# Altium PCB XPIRL_0V0.PCBDOC (part 3 of 4)
Units mil, origin at the board's own origin, x right, y up, seen from the top; angles counter-clockwise.
Board outline 3497.26 x 1372.5 mil, 6 copper layers (Top Layer, Mid-Layer 1, Mid-Layer 2, Mid-Layer 3, Mid-Layer 4, Bottom Layer); 217 components, 126 nets, 782 pads, 361 vias.
Unrouted connection lines stored in the file: 96.
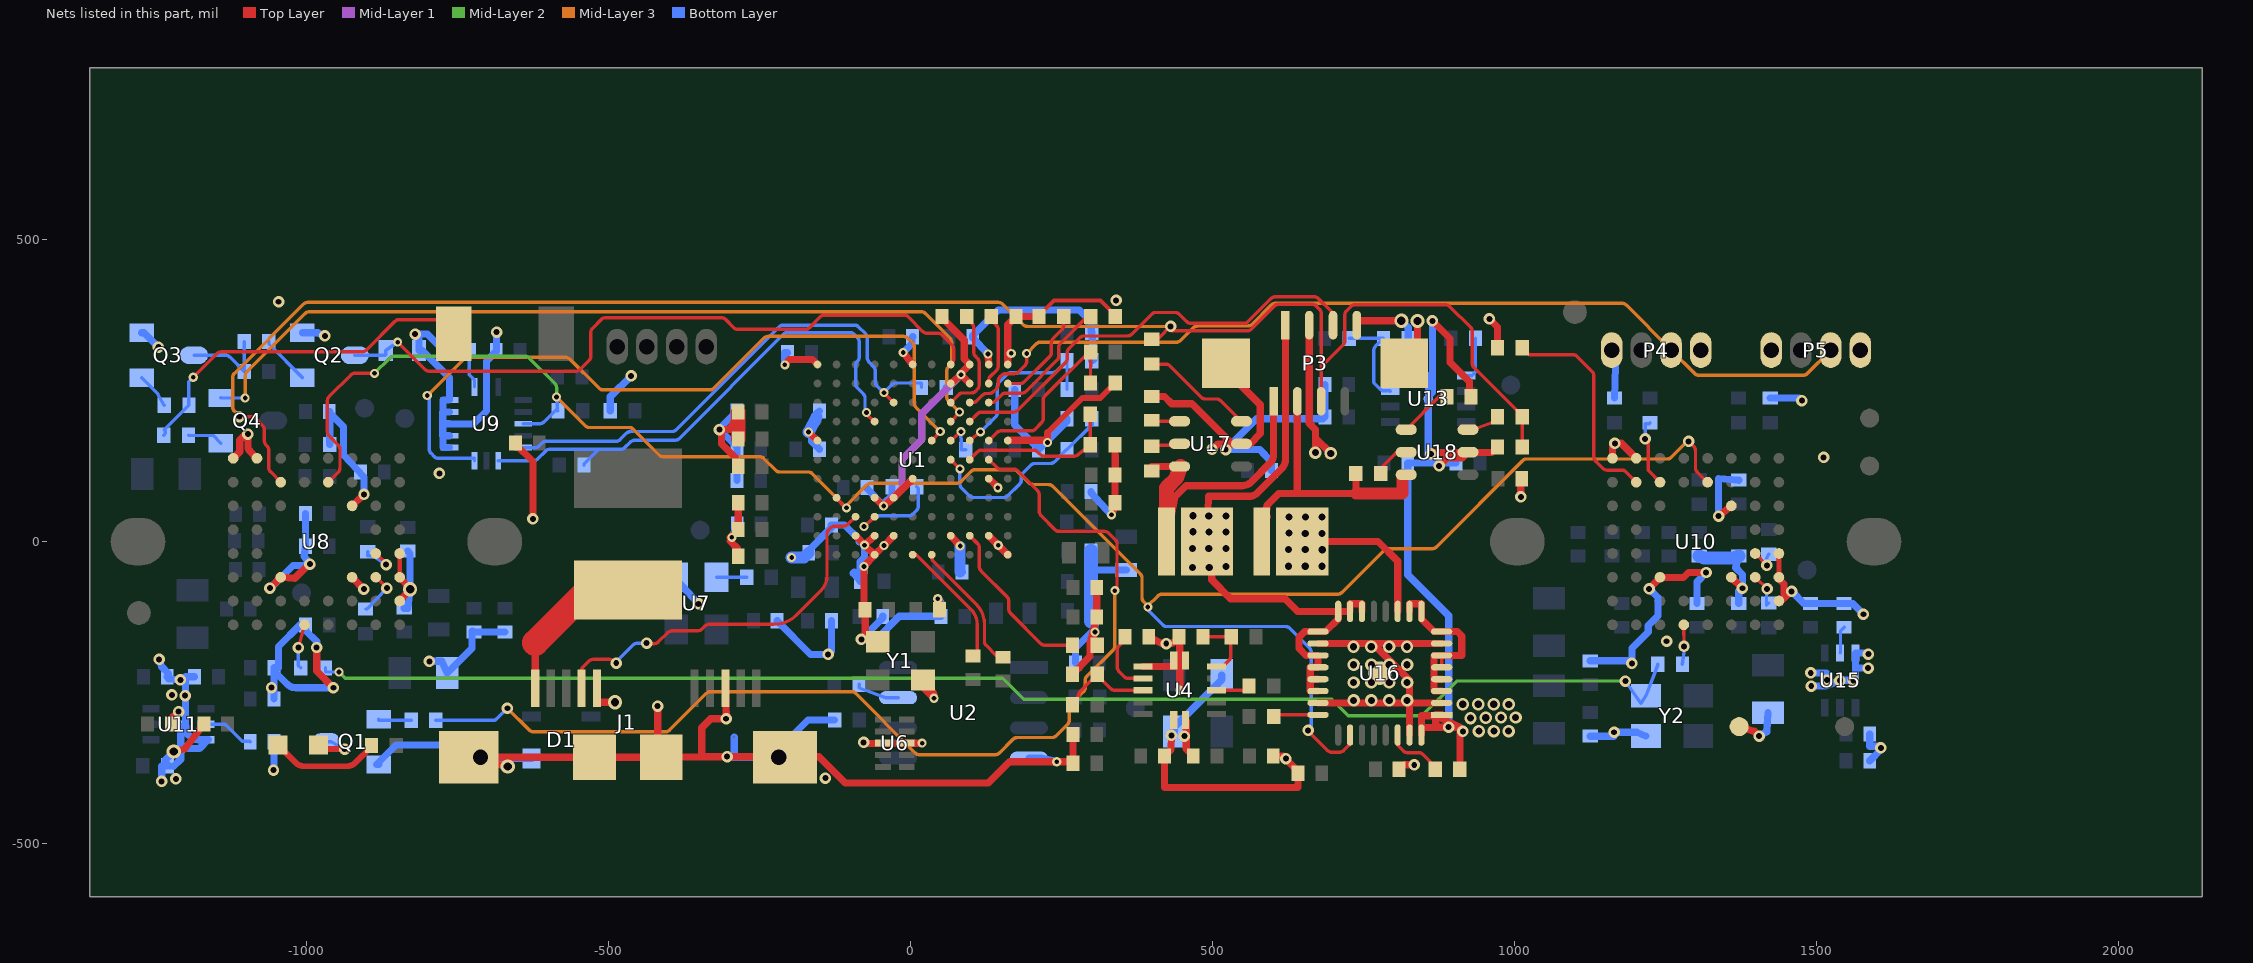
[diagram p7: the nets of this part, all layers, seen from the top]

## Via types
v1: diameter 19, hole 9.84, Top Layer to Bottom Layer, 139 vias
v2: diameter 15, hole 7.87, Top Layer to Bottom Layer, 113 vias
v3: diameter 20.47, hole 11.81, Top Layer to Bottom Layer, 58 vias
v4: diameter 23.62, hole 13.78, Top Layer to Bottom Layer, 42 vias
v5: diameter 0, hole 0, Top Layer to Bottom Layer, 9 vias

## Nets (pads, with @x,y where several pads share a name; then routed paths per layer and width w, separated by ;. In a path a pad name is that pad's centre, name@x,y a point inside that pad or via, vN(x,y) a via of type N, cw(c..) or ccw(c..) an arc to the next point about the centre after c; other vN are vias at no path point) (continued)
FX3_SDA: R25.2 U1.D10 U8.G4 U9.3 U10.G4 U16.26 | length 3903.4
  Top Layer w5.6: U8.G4@-964.57,98.43 -948.07,114.92 ccw(c-955,121.85) -945.2,121.85 -945.2,152.83 ccw(c-955,152.83) -948.07,159.76 -963.1,174.78 cw(c-956.17,181.71) -965.97,181.71 -965.97,233.31 cw(c-956.17,233.31) -963.1,240.24 -927.65,275.68 cw(c-920.72,268.75) -920.72,278.55 v2(-888.15,278.55) ; U1.D10@-123.11,72.7 -109.17,55.97 v2(-106.79,55.92) ; v1(657.4,-312.66) 656.93,-313.14 689.52,-345.73 ccw(c696.45,-338.8) 696.45,-348.6 709.68,-348.6 ccw(c709.68,-338.8) 716.61,-345.73 724.16,-338.18 ccw(c717.23,-331.25) 727.03,-331.25 U16.26@727.03,-320.3 ; v1(1287.57,165.94) 1295.99,157.53 ; 1295.99,157.53 cw(c1289.06,150.6) 1298.86,150.6 ; 1295.99,157.53 cw(c1289.06,150.6) 1298.86,150.6 ; 1295.99,157.53 cw(c1289.06,150.6) 1298.86,150.6 ; 1295.99,157.53 cw(c1289.06,150.6) 1298.86,150.6 ; 1298.86,121.92 ccw(c1308.66,121.92) 1301.73,114.99 ; 1298.86,121.92 ccw(c1308.66,121.92) 1301.73,114.99 ; 1298.86,121.92 ccw(c1308.66,121.92) 1301.73,114.99 ; 1298.86,121.92 ccw(c1308.66,121.92) 1301.73,114.99 ; 1298.86,121.92 1298.86,150.6 ; 1301.73,114.99 U10.G4@1316.56,100.15 ; U10.G4@1316.56,100.15 ccw(c1323.49,107.08) U10.G4@1318.9,98.43 ; U10.G4@1316.56,100.15 ccw(c1323.49,107.08) U10.G4@1318.9,98.43 ; U10.G4@1316.56,100.15 ccw(c1323.49,107.08) U10.G4@1318.9,98.43 ; U10.G4@1316.56,100.15 ccw(c1323.49,107.08) U10.G4@1318.9,98.43
  Mid-Layer 2 w5.6: v2(-888.15,278.55) -862.87,303.83 cw(c-855.94,296.9) -855.94,306.7 -638.45,306.7 cw(c-638.45,296.9) -631.52,303.83 -589.52,261.83 cw(c-596.45,254.9) -586.65,254.9 v2(-586.65,239.27)
  Mid-Layer 3 w5.6: v2(-586.65,239.27) -539.09,191.71 ; v2(392.15,-108.47) v2@392.15,-106.43 ; v1(1287.57,165.94) 1285.4,165.96 1259.08,139.64 ; -539.09,191.71 ccw(c-532.16,198.64) -532.16,188.84 ; -539.09,191.71 ccw(c-532.16,198.64) -532.16,188.84 ; -532.16,188.84 -466.35,188.84 ; -466.35,188.84 cw(c-466.35,179.04) -459.43,185.97 ; -466.35,188.84 cw(c-466.35,179.04) -459.43,185.97 ; -459.43,185.97 -416.69,143.23 ; -416.69,143.23 ccw(c-409.76,150.16) -409.76,140.36 ; -416.69,143.23 ccw(c-409.76,150.16) -409.76,140.36 ; -409.76,140.36 -250.35,140.36 ; -250.35,140.36 cw(c-250.35,130.56) -243.42,137.49 ; -250.35,140.36 cw(c-250.35,130.56) -243.42,137.49 ; -243.42,137.49 -224.09,118.17 ; -224.09,118.17 ccw(c-217.16,125.1) -217.16,115.3 ; -224.09,118.17 ccw(c-217.16,125.1) -217.16,115.3 ; -217.16,115.3 -170.23,115.3 ; -170.23,115.3 cw(c-170.23,105.5) -163.3,112.42 ; -170.23,115.3 cw(c-170.23,105.5) -163.3,112.42 ; -163.3,112.42 v2(-106.79,55.92) -108.7,57.83 -72.7,93.83 ; -72.7,93.83 cw(c-65.77,86.9) -65.77,96.7 ; -72.7,93.83 cw(c-65.77,86.9) -65.77,96.7 ; -72.7,93.83 cw(c-65.77,86.9) -65.77,96.7 ; -65.77,96.7 76.42,96.7 ; 76.42,96.7 ccw(c76.42,106.5) 83.35,99.57 ; 76.42,96.7 ccw(c76.42,106.5) 83.35,99.57 ; 76.42,96.7 ccw(c76.42,106.5) 83.35,99.57 ; 83.35,99.57 100.11,116.33 ; 100.11,116.33 cw(c107.04,109.4) 107.04,119.2 ; 100.11,116.33 cw(c107.04,109.4) 107.04,119.2 ; 100.11,116.33 cw(c107.04,109.4) 107.04,119.2 ; 107.04,119.2 169.49,119.2 ; 169.49,119.2 cw(c169.49,109.4) 176.42,116.33 ; 169.49,119.2 cw(c169.49,109.4) 176.42,116.33 ; 169.49,119.2 cw(c169.49,109.4) 176.42,116.33 ; 176.42,116.33 195.36,97.38 ; 195.36,97.38 ccw(c202.29,104.31) 202.29,94.51 ; 195.36,97.38 ccw(c202.29,104.31) 202.29,94.51 ; 195.36,97.38 ccw(c202.29,104.31) 202.29,94.51 ; 202.29,94.51 227.63,94.51 ; 227.63,94.51 cw(c227.63,84.71) 234.56,91.64 ; 227.63,94.51 cw(c227.63,84.71) 234.56,91.64 ; 227.63,94.51 cw(c227.63,84.71) 234.56,91.64 ; 234.56,91.64 379.75,-53.54 ; 379.75,-53.54 cw(c372.82,-60.47) 382.62,-60.47 ; 379.75,-53.54 cw(c372.82,-60.47) 382.62,-60.47 ; 379.75,-53.54 cw(c372.82,-60.47) 382.62,-60.47 ; 382.62,-92.84 ccw(c392.42,-92.84) 385.49,-99.77 ; 382.62,-92.84 ccw(c392.42,-92.84) 385.49,-99.77 ; 382.62,-92.84 ccw(c392.42,-92.84) 385.49,-99.77 ; 382.62,-92.84 382.62,-60.47 ; 385.49,-99.77 v2@392.15,-106.43 ; v2@392.15,-106.43 408.4,-90.18 ; 408.4,-90.18 cw(c415.33,-97.11) 415.33,-87.31 ; 408.4,-90.18 cw(c415.33,-97.11) 415.33,-87.31 ; 408.4,-90.18 cw(c415.33,-97.11) 415.33,-87.31 ; 408.4,-90.18 cw(c415.33,-97.11) 415.33,-87.31 ; 415.33,-87.31 706.23,-87.31 ; 706.23,-87.31 ccw(c706.23,-77.51) 713.16,-84.44 ; 706.23,-87.31 ccw(c706.23,-77.51) 713.16,-84.44 ; 706.23,-87.31 ccw(c706.23,-77.51) 713.16,-84.44 ; 706.23,-87.31 ccw(c706.23,-77.51) 713.16,-84.44 ; 713.16,-84.44 782.76,-14.84 ; 782.76,-14.84 cw(c789.69,-21.77) 789.69,-11.97 ; 782.76,-14.84 cw(c789.69,-21.77) 789.69,-11.97 ; 782.76,-14.84 cw(c789.69,-21.77) 789.69,-11.97 ; 782.76,-14.84 cw(c789.69,-21.77) 789.69,-11.97 ; 789.69,-11.97 862.53,-11.97 ; 862.53,-11.97 ccw(c862.53,-2.17) 869.46,-9.1 ; 862.53,-11.97 ccw(c862.53,-2.17) 869.46,-9.1 ; 862.53,-11.97 ccw(c862.53,-2.17) 869.46,-9.1 ; 862.53,-11.97 ccw(c862.53,-2.17) 869.46,-9.1 ; 869.46,-9.1 1012.46,133.9 ; 1012.46,133.9 cw(c1019.39,126.97) 1019.39,136.77 ; 1012.46,133.9 cw(c1019.39,126.97) 1019.39,136.77 ; 1012.46,133.9 cw(c1019.39,126.97) 1019.39,136.77 ; 1012.46,133.9 cw(c1019.39,126.97) 1019.39,136.77 ; 1019.39,136.77 1252.15,136.77 ; 1252.15,136.77 ccw(c1252.15,146.57) 1259.08,139.64 ; 1252.15,136.77 ccw(c1252.15,146.57) 1259.08,139.64 ; 1252.15,136.77 ccw(c1252.15,146.57) 1259.08,139.64 ; 1252.15,136.77 ccw(c1252.15,146.57) 1259.08,139.64
  Bottom Layer w5.6: U9.3@-641.76,194.99 -614.81,194.99 ccw(c-614.81,204.79) -607.88,197.86 -588.25,217.48 R25.2@-584.2,216.62 -585.28,216.62 -585.28,239.27 v2(-586.65,239.27) ; v2(392.15,-108.47) 392.15,-109.23 ccw(c401.95,-109.23) 395.02,-116.16 416.64,-137.78 ccw(c423.57,-130.85) 423.57,-140.65 620.4,-140.65 cw(c620.4,-150.45) 627.33,-143.52 659.81,-176 cw(c652.88,-182.93) 662.68,-182.93 662.68,-302.34 cw(c652.88,-302.34) 659.81,-309.27 656.91,-312.17 v1(657.4,-312.66)
G_FSYNC: U1.G5 U9.8 | length 1252.3
  Top Layer w5.6: U1.G5@34.37,167.19 v2(48.53,182.06)
  Mid-Layer 3 w5.6: v2(-800.69,241.64) -740.19,302.15 cw(c-733.26,295.22) -733.26,305.02 -571.34,305.02 cw(c-571.34,295.22) -564.41,302.15 -516.26,254 ccw(c-509.33,260.93) -509.33,251.13 -333.16,251.13 ccw(c-333.16,260.93) -326.23,254 -243.43,336.8 cw(c-236.5,329.87) -236.5,339.67 -11.95,339.67 cw(c-11.95,329.87) -5.02,336.8 2.91,328.86 cw(c-4.02,321.93) 5.78,321.93 5.78,228.87 ccw(c15.58,228.87) 8.65,221.94 v2(48.53,182.06)
  Bottom Layer w5.6: v2(-800.69,241.64) -800.21,241.16 cw(c-807.14,234.24) -797.34,234.24 -797.34,152.85 ccw(c-787.54,152.85) -794.47,145.92 -789.35,140.8 ccw(c-782.42,147.73) -782.42,137.93 -722.87,137.93 -722.47,137.53 U9.8@-722.47,133.96
GND: C1.1 C2.2 C3.1 C4.1 C5.1 C6.1 C7.1 C8.1 C9.1 C10.1 C11.1 C12.1 C13.1 C14.1 C15.1 C16.1 C17.1 C18.2 C19.1 C20.2 C21.1 C22.1 C23.1 C24.1 C25.1 C26.1 C27.1 C28.1 C29.1 C30.2 C31.1 C32.2 C33.1 C34.1 C35.1 C36.2 C37.1 C38.1 C39.1 C40.2 C43.1 C44.1 C45.1 C46.1 C47.1 C48.1 C49.1 C50.2 C51.1 C52.1 C55.2 C56.2 C57.1 C58.1 C59.1 C60.1 C61.1 C65.1 C66.1 C76.2 C77.1 C78.1 C79.1 C81.1 C82.1 C86.1 C94.1 C95.1 C97.1 C98.1 C130.1 C132.1 C134.1 C135.1 C136.1 C137.1 C139.1 C144.1 C145.1 C146.1 C148.1 C152.1 C176.2 C177.1 C178.1 C179.1 C181.1 C182.1 D1.1 GND.1 J1.5 J1.8 J1.11 J1.12 J1.14 J1.15 J1.16 J1.17 P3.8 P3.9 P3.10 P4.1 P4.4 P5.1 P5.4 Q1.2 Q2.2 Q3.2 R4.1 R12.2 R16.2 R17.2 R18.2 R19.2 R20.2 R21.2 R28.2 R29.2 R30.2 R31.2 R32.2 R39.2 R42.2 R53.2 R61.1 R69.1 R75.1 R76.1 R83.2 R93.2 R96.1 R98.1 S2.2 U1.A1 U1.A8 U1.B2 U1.B4 U1.B7 U1.B8 U1.B9 U1.D7 U1.D8 U1.E2 U1.E6 U1.G1 U1.G11 U1.K3 U1.K4 U1.L1 U1.L2 U1.L3 U1.L6 U1.L11 U2.4 U4.6 U4.11 U4.12 U4.13 U4.14 U4.15 U6.3 U6.8 U7.2 U8.B1 U8.C1 U8.C3 U8.C6 U8.D1 U8.F3 U8.H7 U8.H8 U9.9 U9.10 U9.11 U9.12 U9.13 U9.15 U10.B1 U10.C1 U10.C3 U10.C6 U10.D1 U10.F3 U10.H7 U10.H8 U11.3 U11.7 U13.8 U13.9 U15.3 U15.7 U16.1 U16.2 U16.7 U16.18 U16.23 U16.31 U16.32 U16.33 U17.2 U18.2 Y1.2 Y1.4 Y2.2 | length 15375.3
  Top Layer w6.3: R17.2@211.95,372.74 211.95,374.31 236.7,399.06 313.77,399.06 338.52,374.31 R19.2@338.52,372.74
  Top Layer w7.87: U8.C1@-846.46,-59.06 U8.D1@-846.46,-19.69 ; U10.C1@1437.01,-59.06 U10.D1@1437.01,-19.69
  Top Layer w9.84: 226.01,179.98 283.75,237.73 313.42,237.73 R31.2@338.26,262.58
  Top Layer w12: C79.1@-1224.34,-302.13 -1224.34,-293.48 v1(-1212.51,-281.65) ; v4(-1220.5,-347.47) -1202.16,-343.03 C39.1@-1170.56,-302.13 ; U8.H8@-1122.05,137.8 -1111.01,148.83 -1111.01,167.69 -1101.07,177.75 v1(-1097.68,177.75) -1097.68,154.11 -1094.33,150.2 U8.H7@-1082.68,137.8 ; v1(-1061.22,-77.07) U8.C6@-1043.31,-59.06 -1019.96,-60.84 -998.75,-39.63 -992.14,-39.63 v1(-995.17,-37.33) ; v1(-983.85,-175.35) -983.85,-214.35 v1(-956.17,-242.02) ; U8.C3@-925.2,-59.06 v1(-905.71,-78.74) ; U8.F3@-925.2,59.06 v1(-905.46,78.3) ; U8.B1@-846.46,-98.43 v4(-829.13,-78.88) U8.C1@-846.46,-59.06 ; v4(-667.65,-372.4) -754.28,-354.43 J1.17@-732.28,-357.12 J1.15@-413.39,-357.12 ; C43.1@-654.57,163.28 -654.57,161.31 -625.75,132.5 v1(-625.75,37.46) ; J1.5@-519.69,-242.95 -519.69,-265.95 v4(-489.94,-265.95) ; v1(-419.23,-272.43) -419.23,-354.37 J1.15@-413.39,-357.12 ; v1(-316.97,185.54) v1@-313.5,185.54 ; J1.8@-307.09,-242.95 -306.2,-242.95 -306.2,-268.05 v1(-305.86,-293.3) -331.51,-293.3 -346.46,-308.24 -346.46,-356.3 ; C33.1@-285.88,-24.44 -287.53,-11 -299.41,0.87 v2(-296.5,7.06) -299.41,6.49 C40.2@-285.88,20.02 C7.1@-285.88,64.27 ; C4.1@-285.88,124.55 -290.78,139.28 -313.5,162 v1@-313.5,185.54 ; C13.1@-285.88,214.63 -299.79,185.54 v1@-313.5,185.54 ; J1.16@-208.66,-357.12 -243.49,-356.3 -346.46,-356.3 ; v2(-208.7,292.63) -201.48,301.61 -163.04,301.61 U1.L11@-154.6,293.17 ; v2(-169.49,181.51) U1.G11@-154.6,167.19 ; U1.B9@-91.61,9.71 v2(-76.84,-5.88) ; v1(-82.01,-162.07) -61.09,-160.92 -61.89,-162.72 -58.93,-165.68 Y1.2@-54.79,-166.07 -75.45,-156.57 -75.45,-114.81 -75.57,-114.7 C50.2@-76.01,-112.8 -77.77,-111.04 v2(-77.77,-41.24) U1.A8@-60.11,-21.79 ; v1(-78.22,-332.6) -78.1,-334.41 U6.3@-46.35,-333.74 U6.8@-6.98,-333.74 v2(18.57,-333.74) ; U1.B8@-60.11,9.71 v2(-76.84,-5.88) ; U1.D8@-60.11,72.7 v2(-45.14,59.06) -33.08,68.63 U1.D7@-28.62,72.7 U1.E6@2.88,104.19 ; U1.B7@-28.62,9.71 v2(-44.37,-6.56) U1.A8@-60.11,-21.79 ; v2(-12.79,313.22) U1.L6@2.88,293.17 ; v2(44.42,-94.63) 44.42,-96.15 47.36,-99.09 C49.1@47.36,-112.8 ; R16.2@51.44,372.74 46.84,375 88.37,333.48 88.37,302.17 U1.L3@97.37,293.17 82.78,278.58 v2(82.78,276.27) ; U1.B4@65.87,9.71 v2(81.55,-7.26) ; U1.K4@65.87,261.67 v2(82.78,276.27) ; U1.K3@97.37,261.67 v2(82.78,276.27) ; v2(127.41,310.7) U1.L2@128.86,293.17 ; U1.B2@128.86,9.71 v2(144.61,-6.04) U1.A1@160.36,-21.79 ; U1.E2@128.86,104.19 130.71,102.73 130.82,102.73 143.81,89.73 v2(143.81,89.15) ; U1.G1@160.36,167.19 161.12,167.95 222.08,167.95 v2(226.01,164.03) 226.01,179.98 ; U1.L1@160.36,293.17 160.36,304.43 ; v2(166.05,311.75) 160.36,304.43 ; R17.2@211.95,372.74 R12.2@174.09,372.74 160.36,359 160.36,304.43 ; R18.2@267.54,-219.67 296.56,-189.96 296.56,-166.03 R21.2@297.5,-165.09 ; C25.1@268.33,-319.48 C59.1@268.33,-367.12 265.73,-364.52 v2(241.41,-364.52) 163.35,-364.52 128.22,-399.65 -108.89,-399.65 -152.24,-356.3 -346.46,-356.3 ; C21.1@307.7,-76.2 C20.2@307.7,-124.95 R21.2@297.5,-165.09 ; R21.2@308.49,-171.75 299.1,-167.64 v2(304.72,-149.58) R21.2@297.5,-165.09 ; v2(331.88,44.26) 341.43,63.17 C55.2@337.99,64.2 337.68,129.46 338.47,130.24 ; C60.1@337.98,110.35 338.47,127.64 338.47,130.24 ; R28.2@338.01,160.43 338.47,130.24 ; U4.6@383.86,-206.87 444.88,-206.87 C47.1@444.88,-156.08 ; C38.1@393.69,-157.68 417.82,-169.73 418.74,-168.81 v1(422.72,-168.81) 432.16,-168.81 C47.1@443.93,-157.68 C47.1@444.88,-156.08 ; C135.1@398.79,240.28 419.92,240.28 431.82,228.38 465.21,228.38 531.88,161.71 U17.2@544.01,161.71 ; v1(431.33,-320.76) 430.47,-344.46 C17.1@419.92,-355.01 419.92,-406.99 640.9,-406.99 640.9,-380.98 C130.1@640.36,-380.44 ; U4.11@444.88,-246.24 C47.1@444.88,-156.08 ; U4.12@454.72,-295.46 455.87,-296.61 455.87,-343.53 C36.2@467.36,-355.01 ; v1(498.43,152.61) 508.64,161.71 U17.2@544.01,161.71 ; P3.9@521.65,295.28 522.22,294.71 522.22,282.89 578.51,226.6 578.51,179 561.7,161.73 U17.2@547.24,161.73 554.12,161.71 U17.2@544.01,161.71 ; C37.1@599.81,-355.01 616.5,-355.01 v1(620.84,-359.34) C130.1@640.36,-380.44 ; C130.1@640.77,-383.38 640.77,-380.89 C130.1@640.36,-380.44 ; U16.23@673.88,-267.15 U16.2@878.61,-267.15 v3@825.46,-267.15 ; U16.18@673.88,-168.72 712.19,-168.72 ; P3.8@738.19,358.27 738.19,364.46 739.28,365.55 v4(811.99,365.55) ; C137.1@808.31,-376.88 817.19,-369.52 v1(833.31,-369.52) ; P3.10@816.93,295.28 817.32,295.67 838.56,295.67 v4(838.56,365.18) ; U16.31@825.46,-320.3 v3@825.46,-267.15 ; v1(860.83,145.14) 863.3,147.61 U18.2@929.36,147.61 ; v1(863.44,365.26) 892.43,336.26 892.43,297.1 924.91,264.63 924.91,244.79 C134.1@927.13,239.71 ; 865.05,-307.37 845.14,-307.7 U16.32@845.14,-320.3 845.14,-288.42 878.61,-288.42 879.9,-293.42 v1@908.86,-307.2 ; v1(874.48,125.19) 888.1,138.81 913.12,138.81 U18.2@922.32,148.01 922.71,147.61 U18.2@929.36,147.61 ; U16.1@878.61,-286.83 868.84,-286.83 868.84,-307.2 v1(890.34,-307.2) v1@908.86,-307.2 ; U16.7@878.61,-168.72 712.19,-168.72 ; R93.2@908.86,-377.05 v1@908.86,-307.2 ; v1(957.71,368.75) 971.13,355.22 R30.2@971.13,320.99 ; R96.1@971.13,156.58 962.17,147.61 U18.2@929.36,147.61 ; v1(1009.75,74.17) 1009.75,102.64 C136.1@1011.29,104.18 ; U10.H8@1161.42,137.8 1161.42,158.61 v1(1165.45,162.64) 1175.94,162.64 U10.H7@1200.79,137.8 ; v1(1222.21,-78.2) U10.C6@1240.16,-59.06 1278.99,-59.61 1287.37,-51.23 v1(1316.55,-51.17) ; v1(1337.1,42.08) U10.F3@1358.27,59.06 ; U10.C3@1358.27,-59.06 v1(1376.66,-77.26) ; GND.1@1371.16,-306.32 1396.2,-314.1 v1(1404.1,-322) ; U10.B1@1437.01,-98.43 1445.36,-93.92 ; U10.C1@1437.01,-59.06 1435.7,-60.68 1445.36,-70.35 1445.36,-93.92 ; v1(1458.04,-82.29) 1445.36,-93.92 ; J1.15@-413.39,-357.12 -346.46,-356.3 ; v2(-76.84,-5.88) U1.A8@-60.11,-21.79 ; 712.19,-168.72 764.62,-168.72 825.46,-229.56 v3@825.46,-267.15 ; Y1.4@13.87,-234.98 25.19,-234.98 Y1.4@20.01,-229.07 38.2,-252.15 v2(38.2,-259.31) Y1.4@13.87,-234.98
  Top Layer w23.62: C12.1@-285.88,169.63 C13.1@-285.88,214.63
  Mid-Layer 1 w12: v2(-45.14,59.06) -14.82,87.96 -14.82,136.1 17.95,168.87 17.95,211.44 v2(82.78,276.27)
  Bottom Layer w12: Q3.2@-1273.54,345.94 -1269.85,345.94 v1(-1245.72,321.81) ; v1(-1244.6,-194.9) -1240.28,-207.21 -1229.25,-218.24 C78.1@-1229.25,-226.92 ; v1(-1240.4,-396.91) -1240.4,-371.97 R42.2@-1230.84,-371.21 ; C78.1@-1231.28,-223.77 -1229.25,-225.79 C78.1@-1229.25,-226.92 ; U11.7@-1212.6,-302.19 -1208.66,-310.07 -1208.66,-347.04 -1208.78,-347.16 -1208.78,-360.25 -1220.82,-372.28 R42.2@-1230.84,-371.21 ; v1(-1209.32,-228.92) C78.1@-1229.25,-226.92 ; C86.1@-1185.97,-223.77 -1200.89,-223.77 -1200.89,-292 -1200.65,-315.72 -1188.59,-327.78 U11.3@-1167.32,-327.78 -1163.39,-327.78 -1178.35,-342.75 -1202.16,-342.75 v4(-1220.5,-347.47) -1234.89,-361.87 R42.2@-1230.84,-371.21 ; v1(-1061.22,-77.07) -1060.61,-77.07 -1023.01,-39.47 -991.98,-39.47 v1(-995.17,-37.33) -1004.27,-24.86 C44.1@-1002.33,-7.59 C61.1@-1002.33,46.33 ; v1(-1055.27,-378.41) -1054.46,-377.59 C81.1@-1054.4,-331.23 ; C46.1@-1054.49,-260.61 C77.1@-1054.49,-214.13 ; Q2.2@-1007.27,345.94 -981.74,345.94 -980.9,345.1 v1(-970.28,340.59) ; v1(-983.85,-175.35) -983.85,-165.52 -1002.33,-147.04 C52.1@-1002.33,-137.92 -1002.51,-137.74 -1010.99,-137.74 -1047.12,-173.87 -1047.12,-209.05 C77.1@-1054.49,-209.05 C77.1@-1054.49,-214.13 ; R98.1@-962.18,160.6 -962.18,214.76 C22.1@-962.96,215.55 -962.96,213.58 -939.4,190.02 -939.4,143.28 -905.46,106.86 v1(-905.46,78.3) ; v1(-956.17,-242.02) -1017.9,-242.02 ; Q1.2@-881.17,-369.05 -884.7,-369.05 -852.41,-336.75 -724.31,-336.75 J1.11@-712.6,-357.12 -682.93,-357.12 v4(-667.65,-372.4) -665.92,-370.67 -665.92,-359.16 D1.1@-627.93,-359.16 ; C48.1@-838.86,-110.28 -832.8,-110.28 v4(-829.13,-78.88) -829.13,-19.7 C82.1@-833,-15.82 ; v1(-820.91,343.58) v1@-814.22,343.58 ; v1(-797.29,-198.19) -776.91,-198.19 C45.1@-767.63,-217.72 -726.64,-176.74 -726.64,-147.93 -725.24,-147.93 C51.1@-723.52,-149.65 C28.1@-672.01,-149.65 ; C57.1@-770.31,316.43 -776,318.33 -776,318.83 -800.75,343.58 v1@-814.22,343.58 ; U9.9@-763.81,155.62 -774.69,155.62 -774.69,175.3 U9.10@-763.81,175.3 -774.92,175.3 U9.11@-774.92,194.99 ; v1(-686.01,346.72) -686.01,316.84 C58.1@-686.42,316.43 -686.42,314.92 -702.78,298.56 U9.15@-702.78,256.01 -702.78,216.3 -724.5,194.58 -753.49,194.58 U9.11@-763.81,194.99 U9.11@-774.92,194.99 ; R76.1@-497.6,216.62 -497.6,239.85 v1(-463.13,274.32) ; U7.2@-388.61,-59.06 -388.61,-62.98 v1(-351.59,-103.3) ; v2(-296.5,7.06) -287.62,27.14 C24.1@-287.62,29.01 ; v5(-292.6,-323.46) -292.6,-357.12 J1.12@-218.5,-357.12 -218.5,-343.34 -170.42,-295.26 R4.1@-126.34,-295.26 ; C66.1@-288.09,100.99 C95.1@-288.09,152.73 -288.09,156.67 v1(-316.97,185.54) -316.97,187.34 C97.1@-288.09,216.22 ; C1.1@-221.47,-131.06 -221.47,-131.57 -166.17,-186.86 v1(-137.03,-186.86) -131.6,-181.43 C8.1@-131.6,-131.06 ; v2(-208.7,292.63) -208.7,312.61 C23.1@-204.19,312.61 ; v2(-169.49,181.51) -164.37,176.39 -164.37,165.7 C9.1@-151.23,152.73 ; C6.1@-169.25,-18.4 -169.25,-14.61 -131.76,22.88 C16.1@-131.76,27.51 -109.8,27.51 -85.64,3.35 -85.64,-0.85 -81.87,-0.85 v2(-76.84,-5.88) -76.84,-25.93 -83.72,-32.81 C19.1@-83.72,-65.49 -95.6,-52.31 -94.16,-50.88 -93.77,-50.88 -93.77,-52.31 -77.77,-52.31 v2(-77.77,-41.24) ; C26.1@-156.07,206.35 -156.07,212.95 C26.1@-151.23,216.22 ; C10.1@-72.76,89.35 -72.76,87.82 v2(-45.14,59.06) -43.96,58.82 -43.96,63.53 -31.16,76.32 R20.2@-31.16,90.67 ; C18.2@-46.51,-123.8 -46.51,-126.57 v1(-82.01,-162.07) -57.52,-162.07 -19.25,-123.8 C30.2@49.75,-123.8 49.75,-99.97 v2(44.42,-94.63) ; v2(-12.79,313.22) 0.9,326.91 C5.1@2.84,339.13 ; R75.1@58.51,255.1 61.6,255.1 v2(82.78,276.27) ; v2@81.33,-7.47 v2(81.55,-7.26) ; v2(127.41,310.7) 102.31,337.6 C94.1@102.31,339.24 102.31,341.21 144.46,383.36 278.83,383.36 298.61,363.58 298.61,347.26 R39.2@299.27,346.6 302.87,301.26 R29.2@299.27,299.33 ; C3.1@171.87,251.8 171.87,193.17 C14.1@205.44,159.6 ; U2.4@195.41,-358.46 216.08,-358.46 v2(241.41,-364.52) ; v2(226.01,164.03) 212.13,164.42 C14.1@205.44,159.6 ; R32.2@258.32,203.25 258.32,199.09 C14.1@211.24,152 C14.1@205.44,159.6 ; C15.1@272.51,-200.8 272.51,-176.2 299.12,-149.58 v2(304.72,-149.58) 304.72,-137.79 298.75,-131.81 ; C35.1@298.12,83.11 298.12,81.63 v2(331.88,44.26) ; C11.1@298.48,-114.34 298.48,-66.25 C56.2@298.12,-65.89 C27.1@298.12,-15.42 298.12,-47.15 S2.2@356.5,-47.15 ; C65.1@435.96,-314.68 435.96,-307.26 514.7,-228.52 C34.1@514.7,-221.09 ; C132.1@596.71,117.75 596.71,132.3 577.5,152.29 v1(521.09,152.29) 571.96,203.16 682.39,203.16 C98.1@685.38,206.16 C2.2@685.38,260.27 ; U13.8@793.47,274.73 857.16,274.73 ; v4(811.99,365.55) 823.25,354.29 R53.2@823.25,336.32 823.25,274.73 857.16,274.73 ; v1(863.44,365.26) 863.44,247.12 U13.9@857.16,240.85 ; v1(890.34,-307.2) 890.34,-122.75 822.46,-54.87 C32.2@822.46,129.94 856.46,129.94 ; C29.1@902.59,129.94 856.46,129.94 ; C182.1@1124.77,-322.09 1163.41,-322.09 1164.12,-321.37 v1(1164.12,-315.69) 1202.19,-315.69 Y2.2@1216.79,-322.04 ; C144.1@1124.77,-197.46 1189.41,-197.43 v1(1193.7,-201.71) 1193.7,-176.61 1220.71,-149.59 1220.71,-138.96 1236.72,-122.95 1236.72,-92.71 v1(1222.21,-78.2) ; P4.4@1160.12,317.13 1167.44,317.13 R69.1@1164.93,237.81 ; C148.1@1301.53,-102.44 1301.53,-66.55 v1(1316.55,-51.17) ; v1(1337.1,42.08) 1336.97,104.23 C176.2@1370.55,101.73 ; C145.1@1370.55,-102.44 1370.55,-82.1 1373.84,-82.1 v1(1376.66,-77.26) 1376.64,-54.61 1365.33,-43.3 C146.1@1370.55,-24.11 ; v1(1404.1,-322) 1416.67,-314.79 C139.1@1418.8,-283.29 ; R83.2@1422.82,237.81 1470.76,237.81 v1(1475.1,233.46) ; v1(1458.04,-82.29) 1478.22,-102.44 C177.1@1489.27,-102.44 C181.1@1544.95,-102.44 1559.18,-102.44 v1(1576.99,-120.25) ; v1(1489.71,-217.53) 1515.49,-217.53 1516.53,-220.55 v1(1516.53,-229.35) ; v1(1490.51,-239.16) 1513.78,-239.16 1513.93,-239.01 U15.7@1538.21,-229.73 1538.34,-229.59 1562.12,-229.59 1563.8,-227.91 1563.8,-209.43 ; v1(1584.59,-209.43) 1563.8,-209.43 ; v1(1585.23,-186.14) 1583.54,-184.45 U15.3@1563.8,-184.45 1563.8,-209.43 ; C179.1@1587.44,-362.77 1605.83,-344.38 v1(1605.83,-341.4) 1603.21,-338.77 1587.44,-338.77 C178.1@1587.44,-318.64 ; C77.1@-1054.49,-214.13 -1032.75,-235.87 ; -1032.75,-235.87 ccw(c-1017.9,-221.02) -1017.9,-242.02 ; -1032.75,-235.87 ccw(c-1017.9,-221.02) -1017.9,-242.02 ; v1@-814.22,343.58 R61.1@-814.22,316.43 -808.87,316.43 -763.81,271.36 U9.13@-763.81,234.36 -774.69,234.36 -774.69,214.67 U9.12@-763.81,214.67 -774.92,214.67 U9.11@-774.92,194.99 ; 856.46,129.94 U13.9@856.46,236.35 857.16,237.05 U13.9@857.16,240.85 ; U13.9@857.16,240.85 857.16,274.73
  Bottom Layer w13.78: C31.1@81.33,-50.26 C31.1@84.65,-50.26
  Bottom Layer w17.72: C31.1@81.33,-50.26 v2@81.33,-7.47
  Bottom Layer w19.68: v2(-197.44,-26.23) -177.08,-26.23 C6.1@-169.25,-18.4 ; v2(-169.49,181.51) C26.1@-156.07,206.35
  Bottom Layer w21.65: C152.1@1305.01,-24.11 1312.7,-26.9 1360.8,-26.9 C146.1@1370.55,-24.11
  Bottom Layer w23.62: C27.1@298.12,-15.42 298.75,-131.81
  other v1: -1217.02,-392.76 -141.57,-391.61 -304.38,-355.98 452.72,-322.17 913.85,-314.22 -1201.65,-255.13 -1223.38,-253.85 -1058.58,-241.6 1538.04,-230.1 1560.06,-229.67 1251.23,-164.97 -780.54,113.04 1511.06,139.34 -1046.69,397.02 339.6,399.46
  other v3: 940.24,-313.75 965.03,-313.75 989.47,-313.75 926.37,-292.28 951.62,-291.73 976.99,-291.24 1001.08,-291.24 913.65,-269.27 939.13,-269.35 964.8,-269.35 989.65,-269.43 732.85,-262.88 762.38,-262.88 791.9,-262.88 821.43,-262.88 732.85,-233.35 762.38,-233.35 791.9,-233.35 821.43,-233.35 732.85,-203.82 762.38,-203.82 791.9,-203.82 821.43,-203.82 732.66,-174.15 762.19,-174.15 791.71,-174.15 821.24,-174.15
GPIO45: R6.1 U1.F2 | length 1779.2
  Top Layer w5.6: U1.F2@128.86,135.69 141.73,122.82 ccw(c148.66,129.75) 148.66,119.95 169.82,119.95 cw(c169.82,110.15) 176.75,117.08 209.72,84.11 cw(c202.79,77.18) 212.59,77.18 212.59,49.78 ccw(c222.39,49.78) 215.46,42.85 238.56,19.76 ccw(c245.49,26.69) 245.49,16.89 320.52,16.89 cw(c320.52,7.09) 327.45,14.02 338.38,3.08 cw(c331.45,-3.85) 341.25,-3.85 341.25,-75.41 339.33,-77.33 339.33,-79.53 v2(337.54,-81.32)
  Mid-Layer 3 w5.6: v1(-668.14,-275.89) -632.26,-311.77 ccw(c-625.33,-304.84) -625.33,-314.64 -405.96,-314.64 ccw(c-405.96,-304.84) -399.03,-311.77 -338.5,-251.23 cw(c-331.57,-258.16) -331.57,-248.36 -98.55,-248.36 cw(c-98.55,-258.16) -91.62,-251.23 7.28,-350.13 ccw(c14.21,-343.2) 14.21,-353 139.18,-353 ccw(c139.18,-343.2) 146.11,-350.13 168.97,-327.27 cw(c175.9,-334.2) 175.9,-324.4 233.58,-324.4 ccw(c233.58,-314.6) 240.51,-321.53 259.12,-302.92 ccw(c252.19,-295.99) 261.99,-295.99 261.99,-276.43 cw(c271.79,-276.43) 264.87,-269.5 285.62,-248.74 ccw(c278.69,-241.81) 288.49,-241.81 288.49,-229.74 cw(c298.29,-229.74) 291.36,-222.81 334.67,-179.5 ccw(c327.74,-172.57) 337.54,-172.57 v2(337.54,-81.32)
  Bottom Layer w5.6: R6.1@-786.52,-295.95 -692.26,-295.95 ccw(c-692.26,-286.15) -685.33,-293.08 v1(-668.14,-275.89)
IMU_INT: R44.1 U1.H8 U9.6 | length 877.9
  Top Layer w5.6: v2(-73.41,213.89) -75.93,212.26 -75.86,211.5 U1.H8@-60.11,198.68
  Bottom Layer w5.6: U9.6@-683.1,133.96 -624.75,133.96 ccw(c-624.75,143.76) -617.82,136.83 -604.65,150 cw(c-597.72,143.07) -597.72,152.87 -516.64,152.87 ; R44.1@-541.27,126.67 -541.27,128.25 -516.64,152.87 ; v2(-73.41,213.89) -75.93,213.89 -75.93,237.51 ccw(c-85.73,237.51) -78.8,244.44 -88.73,254.38 cw(c-81.8,261.31) -91.6,261.31 -91.6,291.24 cw(c-81.8,291.24) -88.73,298.17 -88.3,298.61 ccw(c-95.23,305.54) -85.43,305.54 -85.43,330.41 ccw(c-95.23,330.41) -88.3,337.34 -94.14,343.17 ccw(c-101.07,336.24) -101.07,346.04 -204.09,346.04 ccw(c-204.09,336.24) -211.02,343.17 -383.72,170.48 cw(c-390.65,177.41) -390.65,167.61 -457.71,167.61 ccw(c-457.71,157.81) -464.64,164.73 -473.63,155.74 cw(c-480.56,162.67) -480.56,152.87 -516.64,152.87
LEDOUT0: P3.5 R94.2 R95.2 R96.2 U8.G6 | length 2959.1
  Top Layer w5.6: v1(-1111.78,206.99) -1092.42,206.99 cw(c-1092.42,197.19) -1085.49,204.12 -1073.21,191.83 cw(c-1080.14,184.9) -1070.34,184.9 -1070.34,166.54 ccw(c-1060.54,166.54) -1067.47,159.61 -1065.86,158 cw(c-1072.79,151.07) -1062.99,151.07 -1062.99,122.17 ccw(c-1053.19,122.17) -1060.12,115.24 U8.G6@-1043.31,98.43 ; R95.2@398.79,334.82 404.3,334.82 ccw(c404.3,344.62) 411.23,337.69 429.67,356.12 v1(429.92,356.12) 431,355.05 431,348.87 556.51,348.87 ; R96.2@1012.08,156.58 R94.2@1012.08,206.55 1012.08,208.13 932.23,287.98 cw(c939.16,294.91) 929.36,294.91 929.36,347.97 ccw(c919.56,347.97) 926.49,354.9 892.29,389.1 ccw(c885.36,382.17) 885.36,391.97 859.9,391.97 734.91,391.97 ccw(c734.91,382.17) 727.98,389.1 721.37,382.49 ccw(c728.3,375.57) 718.5,375.57 718.5,332.95 cw(c708.7,332.95) 715.63,326.02 679.13,289.52 P3.5@679.13,232.28 679.13,378.01 ; 556.51,348.87 ccw(c556.51,358.67) 563.44,351.74 ; 556.51,348.87 ccw(c556.51,358.67) 563.44,351.74 ; 563.44,351.74 601.72,390.01 ; 601.72,390.01 cw(c608.65,383.08) 608.65,392.88 ; 601.72,390.01 cw(c608.65,383.08) 608.65,392.88 ; 608.65,392.88 664.26,392.88 ; 664.26,392.88 cw(c664.26,383.08) 671.19,390.01 ; 664.26,392.88 cw(c664.26,383.08) 671.19,390.01 ; 671.19,390.01 676.26,384.94 ; 676.26,384.94 cw(c669.33,378.01) 679.13,378.01 ; 676.26,384.94 cw(c669.33,378.01) 679.13,378.01
  Mid-Layer 3 w5.6: v1(-1111.78,206.99) -1111.78,207.45 -1119.8,215.47 cw(c-1112.87,222.4) -1122.67,222.4 -1122.67,272.03 cw(c-1112.87,272.03) -1119.8,278.96 -1005.65,393.11 cw(c-998.72,386.18) -998.72,395.98 145.08,395.98 cw(c145.08,386.18) 152.01,393.11 186.12,358.99 ccw(c193.05,365.92) 193.05,356.12 v1(429.92,356.12)
LEDOUT1: R81.1 U10.G6 | length 119.1
  Top Layer w5.6: v1(1215.44,169.86) 1220.64,169.86 1220.64,117.94 U10.G6@1240.16,98.43
  Bottom Layer w5.6: v1(1215.44,169.86) 1215.44,195.35 1222.15,195.35 R81.1@1223.66,196.86
LIMA_CATH1: LIMA1.2 P3.4 U16.3 U16.4 U16.5 U16.6 U16.8 U16.9 U16.10 U16.11 | length 862.1
  Top Layer w5.6: U16.5@878.61,-208.09 U16.6@878.61,-188.41
  Top Layer w12: LIMA1.2@647.64,0 773.29,0 805.77,-32.48 U16.11@805.77,-115.57 ; P3.4@659.45,358.27 659.45,195.77 669.6,185.61 669.6,170.44 ; v3(669.6,147.26) 669.6,170.44 ; v3(695.1,146.11) 670.77,170.44 669.6,170.44 ; U16.10@825.46,-115.57 825.46,-102.97 845.14,-102.97 U16.9@845.14,-115.57 845.14,-128.17 866.01,-149.04 U16.8@878.61,-149.04 904.78,-149.04 911.98,-156.23 ; U16.3@878.61,-247.46 866.01,-247.46 U16.4@866.01,-227.78 ; U16.4@878.61,-227.78 U16.4@866.01,-227.78 ; U16.4@866.01,-227.78 866.01,-188.41 U16.6@878.61,-188.41 911.98,-188.41 ; 911.98,-188.41 912.24,-188.41 912.24,-156.49 911.98,-156.23 ; 911.98,-188.41 911.98,-156.23
  Mid-Layer 3 w12: v3@691.51,143.54 691.51,142.53 v3(695.1,146.11)
  other v3: 625.23,-40.79 652.87,-40.79 680.8,-40.79 680.87,-13.59 625.15,-13.23 652.92,-13.23 680.42,13.38 626.02,14.39 652.83,13.67 626.12,40.97 653.02,40.76 680.61,40.76
LIMA_CATH2: LIMA2.2 P3.2 U16.14 U16.15 U16.16 U16.17 U16.19 U16.20 U16.21 U16.22 | length 1097.3
  Top Layer w12: LIMA2.2@525.45,-3.8 525.15,-4.09 LIMA2.2@490.16,0 ; P3.2@620.08,358.27 620.08,135.72 cw(c599.08,135.72) 613.93,120.87 574.17,81.12 cw(c559.32,95.97) 559.32,74.97 492.5,74.97 LIMA2.2@490.16,0 ; U16.22@673.88,-247.46 661.28,-247.46 U16.21@661.28,-227.78 ; U16.21@673.88,-227.78 U16.21@661.28,-227.78 ; U16.16@707.35,-111.61 U16.16@707.35,-115.57 ; U16.14@746.72,-115.57 746.72,-102.97 727.03,-102.97 U16.15@727.03,-115.57 U16.16@707.35,-115.57 ; LIMA2.2@490.16,0 496.45,-4.71 497.87,-6.12 497.87,-63.23 529.16,-94.53 619.31,-94.53 640.56,-115.78 707.14,-115.78 U16.16@707.35,-115.57 ; U16.21@661.28,-227.78 661.28,-208.09 U16.20@673.88,-208.09 U16.19@673.88,-188.41 654.2,-188.41 642.5,-176.71 642.5,-158.56 652.03,-149.04 U16.17@673.88,-149.04 686.48,-149.04 707.35,-128.17 U16.16@707.35,-115.57
  other v3: 466.25,-42.71 493.83,-42.76 521.51,-41 466.12,-11.74 493.15,-11.55 521.51,-11.42 466.98,16.2 493.19,15.87 521.51,15.86 493.13,42.43 521.45,42.41 466.92,42.76
LIMA_DR1: LIMA1.1 P3.3 R90.1 U18.6 | length 588.7
  Top Layer w12: LIMA1.1@590.11,41.23 589.52,40.64 LIMA1.1@580.71,0 589.85,60.7 608.76,79.61 ; P3.3@639.76,232.28 639.76,79.61 608.76,79.61 ; R90.1@736.66,112.69 736.66,79.61 608.76,79.61 ; U18.6@813.52,109.77 U18.6@819.96,110.61
  Top Layer w20: 736.66,79.61 813.52,79.61 U18.6@813.52,109.77
LIMA_DR2: LIMA2.1 P3.1 R91.1 U17.6 | length 549.3
  Top Layer w12: R91.1@398.79,116.78 398.79,124.46 446.09,124.46 446.09,123.12 U17.6@444.88,124.33 ; LIMA2.1@423.23,0 437.08,74.12 455.49,92.53 548.57,92.53 ccw(c548.57,113.53) 563.42,98.68 594.24,129.51 ccw(c579.39,144.36) 600.39,144.36 P3.1@600.39,232.28
  Top Layer w25: LIMA2.1@423.23,0 423.23,88.93 439.16,104.86 U17.6@446.09,124.46
MCLK27M': R22.1 U10.A5 | length 69.2
  Top Layer w5.6: U10.A5@1279.53,-137.8 v1(1279.88,-173.49)
  Bottom Layer w5.6: R22.1@1277.26,-203.17 1281.59,-172.15 v1(1279.88,-173.49)
MCLK27M'': R24.1 U8.A5 | length 74.2
  Top Layer w5.6: v1(-1014.04,-175.67) U8.A5@-1003.94,-137.8
  Bottom Layer w5.6: v1(-1014.04,-175.67) -1014.04,-205.23 R24.1@-1010.2,-209.07
MCLK27M_ORG: R22.2 R24.2 Y2.3 | length 2328.8
  Mid-Layer 2 w5.6: v2(-946.74,-215.92) -936.3,-226.36 152.38,-226.36 187.08,-261.07 696.62,-261.07 724.11,-288.55 804.76,-288.55 845.68,-288.55 903.39,-230.83 1112.09,-230.83 v1(1182.71,-230.86)
  Bottom Layer w5.6: R24.2@-969.26,-209.07 -969.26,-215.92 v2(-946.74,-215.92) ; v1(1182.71,-230.86) 1208.41,-267.89 Y2.3@1216.79,-255.11 1236.31,-204.75 R22.2@1236.31,-203.17
NCS: R75.2 U1.J7 U9.5 | length 944.8
  Top Layer w5.6: v2(-44.68,246.5) U1.J7@-28.62,230.18
  Bottom Layer w5.6: U9.5@-641.76,155.62 -622.13,155.62 ; -69.26,297.15 -62,289.89 ; R75.2@17.57,255.1 16.8,262.59 -24.53,262.59 ccw(c-24.53,252.79) -31.46,259.72 v2(-44.68,246.5) -56.26,258.08 ; -622.13,155.62 ccw(c-622.13,165.42) -615.2,158.49 ; -622.13,155.62 ccw(c-622.13,165.42) -615.2,158.49 ; -615.2,158.49 -610.31,163.38 ; -610.31,163.38 cw(c-603.38,156.45) -603.38,166.25 ; -610.31,163.38 cw(c-603.38,156.45) -603.38,166.25 ; -603.38,166.25 -488.01,166.25 ; -488.01,166.25 ccw(c-488.01,176.05) -481.08,169.12 ; -488.01,166.25 ccw(c-488.01,176.05) -481.08,169.12 ; -481.08,169.12 -470.9,179.3 ; -470.9,179.3 cw(c-463.97,172.37) -463.97,182.17 ; -470.9,179.3 cw(c-463.97,172.37) -463.97,182.17 ; -463.97,182.17 -395.52,182.17 ; -395.52,182.17 ccw(c-395.52,191.97) -388.59,185.04 ; -395.52,182.17 ccw(c-395.52,191.97) -388.59,185.04 ; -388.59,185.04 -218.08,355.55 ; -218.08,355.55 cw(c-211.15,348.62) -211.15,358.42 ; -218.08,355.55 cw(c-211.15,348.62) -211.15,358.42 ; -211.15,358.42 -93.75,358.42 ; -93.75,358.42 cw(c-93.75,348.62) -86.82,355.55 ; -93.75,358.42 cw(c-93.75,348.62) -86.82,355.55 ; -86.82,355.55 -75,343.73 ; -75,343.73 cw(c-81.93,336.8) -72.13,336.8 ; -75,343.73 cw(c-81.93,336.8) -72.13,336.8 ; -72.13,304.08 ccw(c-62.33,304.08) -69.26,297.15 cw(c-62.33,304.08) -72.13,304.08 ; -72.13,304.08 -72.13,336.8 ; -62,289.89 cw(c-68.93,282.96) -59.13,282.96 ; -62,289.89 cw(c-68.93,282.96) -59.13,282.96 ; -59.13,265.01 ccw(c-49.33,265.01) -56.26,258.08 ; -59.13,265.01 ccw(c-49.33,265.01) -56.26,258.08 ; -59.13,265.01 -59.13,282.96
NETC38_2: C38.2 U4.7 | length 120.3
  Top Layer w5.6: C38.2@354.32,-157.68 361.74,-154.99 344.59,-172.14 ccw(c351.52,-179.07) 341.72,-179.07 341.72,-208.29 ccw(c351.52,-208.29) 344.59,-215.22 353.06,-223.69 ccw(c359.99,-216.76) 359.99,-226.56 U4.7@383.86,-226.56
NETC41_1: C41.1 U1.A5 | length 220.3
  Top Layer w5.5: U1.A5@34.37,-21.79 34.37,-25.93 ccw(c44,-25.93) 37.19,-32.73 107.85,-103.39 cw(c74.31,-136.92) 121.74,-136.92 121.74,-165.19 ccw(c131.36,-165.19) 124.56,-171.99 141.16,-188.6 ccw(c147.97,-181.79) 147.97,-191.42 C41.1@152.57,-191.42
NETC42_1: C42.1 U1.A6 | length 220.5
  Top Layer w5.5: U1.A6@2.88,-21.79 8.95,-21.79 99.34,-112.18 cw(c74.25,-137.27) 109.74,-137.27 109.74,-189.16 C42.1@102.87,-189.16
NETC47_2: C47.2 R33.2 U4.5 | length 112.3
  Top Layer w5.6: C47.2@483.3,-157.68 R33.2@530.42,-157.68 529.41,-158.69 529.41,-189.94 cw(c519.61,-189.94) 526.54,-196.87 516.54,-206.87 U4.5@505.91,-206.87
NETC57_2: C57.2 U9.14 | length 63.9
  Bottom Layer w5.6: C57.2@-730.94,316.43 -730.94,275.89 -722.47,267.42 U9.14@-722.47,256.01
NETC81_2: C81.2 U11.2 | length 85.2
  Bottom Layer w5.6: U11.2@-1167.32,-302.19 -1139.26,-302.19 cw(c-1139.26,-311.99) -1132.33,-305.06 -1107.08,-330.31 -1094.69,-330.31 C81.2@-1093.77,-331.23
NETC134_2: C134.2 U18.4 | length 90.3
  Top Layer w5.6: U18.4@819.96,185.41 874.26,239.71 C134.2@887.76,239.71
NETC135_2: C135.2 U17.4 | length 46.7
  Top Layer w5.6: C135.2@398.79,200.91 400.88,199.14 U17.4@444.88,199.14
NETC181_2: C181.2 U15.2 | length 45.4
  Bottom Layer w5.6: U15.2@1538.21,-184.45 1539.04,-183.62 1539.04,-147.73 C181.2@1544.95,-141.81
NETJ1_1: J1.1 L2.1 | length 265.6
  Top Layer w12: J1.1@-622.05,-242.95 -622.05,-167.41 ; L2.1@-473.77,-79.6 L2.1@-468.39,-80.16
  Top Layer w31.5: L2.1@-534.24,-79.6 L2.1@-473.77,-79.6
  Top Layer w43.31: -622.05,-167.41 L2.1@-534.24,-79.6
NETLED1_1: LED1.1 R5.2 | length 182.6
  Top Layer w9.84: LED1.1@-1047.49,-337.13 -1017.77,-366.85 ccw(c-1005.59,-354.67) -1005.59,-371.89 -932.69,-371.89 ccw(c-932.69,-354.67) -920.51,-366.85 -892.89,-339.23 R5.2@-892.89,-337.66
NETLED1_2: LED1.2 Q1.3 | length 82.3
  Top Layer w5.6: LED1.2@-980.56,-343.45 LED1.2@-980.56,-337.13
  Top Layer w9.84: LED1.2@-980.56,-343.45 v1(-937.69,-343.45)
  Bottom Layer w5.6: Q1.3@-967.78,-331.65 -959.32,-331.65 v1(-937.69,-343.45)
NETQ1_1: Q1.1 R6.2 | length 55.4
  Bottom Layer w5.6: Q1.1@-881.17,-294.24 -881.17,-295.95 R6.2@-827.47,-295.95
NETQ2_1: Q2.1 R60.1 | length 83
  Bottom Layer w5.6: R60.1@-1062.94,331.03 -1062.63,330.72 -1062.63,326.5 Q2.1@-1007.27,271.14
NETQ3_1: Q3.1 R62.2 | length 59.3
  Bottom Layer w5.6: Q3.1@-1273.54,271.14 -1247.16,244.75 R62.2@-1236.24,225.7
NETQ3_3: Q3.3 R59.1 R60.2 | length 143.3
  Bottom Layer w5.6: Q3.3@-1186.93,308.54 -1134.93,308.54 cw(c-1134.93,298.74) -1128,305.67 R59.1@-1103.9,281.57 R60.2@-1103.89,331.03
NETQ4_1: Q4.1 R63.2 | length 59
  Bottom Layer w5.6: R63.2@-1196.07,176.12 -1154.98,175.72 Q4.1@-1142.31,163.05
NETR2_1: R2.1 U2.7 | length 73.6
  Bottom Layer w5.6: R2.1@-85.82,-236.18 -85.82,-242.23 -41.8,-258.46 U2.7@-21.13,-258.46
NETR12_1: R12.1 U1.K2 | length 134.9
  Top Layer w5.6: U1.K2@128.86,261.67 128.86,266.83 cw(c138.66,266.83) 131.73,273.76 141.86,283.88 ccw(c134.93,290.81) 144.73,290.81 144.73,350.71 ccw(c134.93,350.71) 141.86,357.64 131.44,368.07 cw(c138.37,375) 128.57,375 128.57,378.03 R12.1@133.14,372.74
NETR14_2: R14.2 U4.3 | length 61.1
  Top Layer w5.6: U4.3@505.91,-246.24 559.66,-246.24 R14.2@559.66,-238.88
NETR15_2: R15.2 R18.1 U4.8 | length 157.3
  Top Layer w5.6: R15.2@267.54,-270.15 274.63,-270.15 274.63,-261.48 279.41,-248.75 R18.1@308.49,-219.67 308.49,-221.25 330.61,-243.37 ccw(c337.54,-236.44) 337.54,-246.24 U4.8@383.86,-246.24
NETR16_1: R16.1 U1.J4 | length 191.6
  Top Layer w5.6: U1.J4@65.87,230.18 78.89,243.19 cw(c85.82,236.26) 85.82,246.06 100.11,246.06 ccw(c100.11,255.86) 107.04,248.94 109.98,251.88 ccw(c103.05,258.81) 112.85,258.81 112.85,296.75 ccw(c103.05,296.75) 109.98,303.68 106.91,306.76 cw(c113.84,313.69) 104.04,313.69 104.04,353.77 ccw(c94.24,353.77) 101.17,360.7 88.21,373.66 88.21,376.15 R16.1@92.38,372.74
NETR17_1: R17.1 U1.K1 | length 162.1
  Top Layer w5.6: U1.K1@160.36,261.67 180.94,261.67 ccw(c180.94,271.47) 187.87,264.55 229.76,306.44 ccw(c222.83,313.37) 232.63,313.37 232.63,329.36 cw(c242.43,329.36) 235.5,336.29 250.03,350.81 ccw(c243.1,357.74) 252.9,357.74 R17.1@252.9,372.74
NETR19_1: R19.1 U1.J2 | length 238.7
  Top Layer w5.6: U1.J2@128.86,230.18 133.34,230.18 ccw(c133.34,239.98) 140.27,233.05 150.21,243 cw(c157.14,236.07) 157.14,245.87 183.62,245.87 ccw(c183.62,255.67) 190.55,248.74 241.67,299.86 ccw(c234.74,306.79) 244.54,306.79 244.54,320.89 cw(c254.34,320.89) 247.41,327.82 292.33,372.74 R19.1@297.57,372.74
NETR20_1: R20.1 U1.C8 | length 161.9
  Top Layer w5.6: v2(-77.57,24.9) U1.C8@-60.11,41.2
  Bottom Layer w5.6: v2(-77.57,24.9) -62.68,39.8 cw(c-55.75,32.87) -55.75,42.67 -3.7,42.67 ccw(c-3.7,52.47) 3.23,45.54 9.4,51.72 ccw(c2.47,58.64) 12.27,58.64 12.27,88.18 R20.1@9.78,90.67
NETR21_1: R21.1 U1.B3 | length 278.8
  Top Layer w5.6: U1.B3@97.37,9.71 110.24,-3.17 cw(c103.31,-10.1) 113.11,-10.1 113.11,-41.33 ccw(c122.91,-41.33) 115.98,-48.26 159.1,-91.37 cw(c152.17,-98.3) 161.97,-98.3 161.97,-111.56 ccw(c171.77,-111.56) 164.84,-118.49 215.23,-168.88 ccw(c222.16,-161.95) 222.16,-171.75 R21.1@267.54,-171.75
NETR27_2: R27.2 U7.3 | length 49.7
  Bottom Layer w5.6: U7.3@-321.68,-59.06 R27.2@-272.02,-59.07
NETR30_1: R30.1 U10.G7 | length 362.3
  Top Layer w5.6: R30.1@1012.08,320.99 1023.44,309.63 1095.57,309.63 cw(c1095.57,299.83) 1102.5,306.76 1127.71,281.55 cw(c1120.78,274.62) 1130.58,274.62 1130.58,140.22 ccw(c1140.38,140.22) 1133.45,133.29 1145.51,121.24 ccw(c1152.44,128.17) 1152.44,118.37 1176.78,118.37 cw(c1176.78,108.57) 1183.71,115.5 U10.G7@1200.79,98.43
NETR40_1: R40.1 U8.C2 | length 76.5
  Top Layer w5.5: U8.C2@-885.83,-59.06 -866.91,-76.55 v1(-867.6,-77.07)
  Bottom Layer w5.6: R40.1@-902.82,-111.67 -901,-111.67 v1(-867.6,-77.07)
NETR41_1: R41.1 U8.D2 | length 72.4
  Top Layer w5.6: U8.D2@-885.83,-19.69 -866.1,-38.66 -866.1,-38.04 v1(-868.69,-38.05)
  Bottom Layer w5.6: R41.1@-899.16,-16.61 -899.16,-23.7 -890.5,-23.7 v1(-868.69,-38.05)
NETR53_1: R53.1 R57.2 U13.7 | length 168.6
  Bottom Layer w5.6: R57.2@725.73,336.32 R53.1@782.3,336.32 769.03,323.05 ccw(c775.96,316.12) 766.16,316.12 766.16,263.28 777.16,252.29 ccw(c784.08,259.22) 784.08,249.42 793.2,249.42 U13.7@793.47,249.14
NETR56_2: R56.2 U13.1 | length 73.3
  Bottom Layer w5.6: U13.1@919.46,274.73 928.31,274.73 934.69,281.11 R56.2@934.66,336.49
NETR62_1: R62.1 R63.1 S1.2 | length 596.5
  Top Layer w5.6: v2(-1188.16,272.05) -1149.03,311.18 cw(c-1142.1,304.25) -1142.1,314.05 -908.7,314.05 ccw(c-908.7,323.85) -901.77,316.92 -854.1,364.6 cw(c-847.17,357.67) -847.17,367.47 -784.36,367.47 cw(c-784.36,357.67) -777.43,364.6 S1.2@-756.72,343.88
  Bottom Layer w5.6: R63.1@-1237.01,176.12 -1234.18,179.93 -1234.18,183.02 -1236.07,184.92 R62.1@-1195.29,225.7 -1195.29,264.59 -1188.16,271.71 v2(-1188.16,272.05)
NETR71_1: R71.1 U10.C2 | length 62.6
  Top Layer w5.5: U10.C2@1397.11,-59.61 U10.C2@1397.64,-59.06
  Top Layer w5.6: U10.C2@1397.11,-59.61 1398.61,-59.61 v1(1417.43,-78.42)
  Bottom Layer w5.5: v1(1417.43,-78.42) 1416.3,-79.14 1416.3,-105.88 R71.1@1420,-101.66
NETR72_1: R72.1 U10.D2 | length 52.9
  Top Layer w5.6: U10.D2@1397.64,-19.69 1417.11,-39.15 v1(1417.11,-39.28)
  Bottom Layer w5.5: v1(1417.11,-39.28) 1415.85,-40.51 1414.58,-40.94 1413.52,-38.31 1412.6,-37.56 R72.1@1420,-21.08
NETR90_2: R90.2 U18.5 | length 71
  Top Layer w5.6: R90.2@774.75,104.32 R90.2@777.61,112.69 777.61,121.41 803.95,148.01 U18.5@819.96,148.01
NETR91_2: R91.2 U17.5 | length 62
  Top Layer w5.6: R91.2@398.79,157.73 398.79,159.5 451.78,159.5 U17.5@444.88,161.73
NETR92_1: R92.1 U16.24 | length 74.5
  Top Layer w5.6: R92.1@600.6,-289.7 603.47,-286.83 U16.24@673.88,-286.83
NETR93_1: R93.1 U16.30 | length 97.1
  Top Layer w5.6: U16.30@805.77,-320.3 805.77,-337.32 814.95,-346.5 ccw(c821.88,-339.57) 821.88,-349.37 840.13,-349.37 cw(c840.13,-359.17) 847.06,-352.24 867.92,-373.09 R93.1@867.92,-377.05
NETR94_1: R94.1 U18.3 | length 57.6
  Top Layer w5.6: U18.3@922.32,185.41 931.18,185.41 971.13,200.58 R94.1@971.13,206.55
NETR95_1: R95.1 U17.3 | length 188.8
  Top Layer w5.6: R95.1@398.79,293.87 421.56,293.87 cw(c421.56,284.07) 428.49,291 480.48,239.01 ccw(c487.41,245.94) 487.41,236.14 505.75,236.14 cw(c505.75,226.34) 512.68,233.27 539.11,206.84 cw(c532.18,199.91) 541.98,199.91 541.98,199.14 U17.3@547.24,199.14
OTG_ID: J1.4 U1.C9 | length 654.8
  Top Layer w5.5: J1.4@-545.28,-242.95 -545.28,-213.91 cw(c-535.48,-213.91) -542.41,-206.98 -533.24,-197.82 cw(c-526.31,-204.75) -526.31,-194.95 -498.24,-194.95 cw(c-498.24,-204.75) -491.31,-197.82 v1(-487.8,-201.34) ; v1(-437.68,-168.18) -444.26,-168.18 -444.26,-168.99 -424.94,-168.99 ccw(c-424.94,-159.19) -418.01,-166.12 -402.49,-150.6 cw(c-395.56,-157.53) -395.56,-147.73 -353.08,-147.73 ccw(c-353.08,-137.93) -346.15,-144.86 -341.09,-139.8 cw(c-334.16,-146.73) -334.16,-136.93 -226.55,-136.93 ccw(c-226.55,-84) -189.13,-121.43 -149.49,-81.79 ccw(c-175.15,-56.12) -138.86,-56.12 -138.86,12.84 cw(c-129.06,12.84) -135.98,19.77 -133,22.76 cw(c-126.07,15.83) -126.07,25.63 -111.24,25.63 ccw(c-111.24,35.43) -104.32,28.5 U1.C9@-91.61,41.2
  Bottom Layer w5.5: v1(-487.8,-201.34) -487.8,-199.1 -459.74,-171.05 cw(c-452.81,-177.98) -452.81,-168.18 v1(-437.68,-168.18)
PIN0: P4.2 P5.2 U1.J3 | length 1571.4
  Top Layer w5.6: U1.J3@97.37,230.18 102.22,230.18 ccw(c102.22,239.98) 109.15,233.05 118.44,242.34 cw(c125.37,235.41) 125.37,245.21 129.52,245.21 ccw(c129.52,255.01) 136.45,248.08 141.72,253.35 ccw(c134.79,260.28) 144.59,260.28 144.6,265.54 cw(c154.4,265.54) 147.47,272.47 150.22,275.22 cw(c157.15,268.29) 157.15,278.09 171.37,278.1 ccw(c171.37,287.9) 178.3,280.97 188.74,291.4 ccw(c181.81,298.33) 191.61,298.33 v2(191.61,311.22)
  Mid-Layer 3 w5.6: v2(191.61,311.22) 207.72,327.33 cw(c214.65,320.4) 214.65,330.2 439.67,330.2 ccw(c439.67,340) 446.6,333.07 467.57,354.03 cw(c474.5,347.1) 474.5,356.9 558.03,356.9 ccw(c558.03,366.7) 564.96,359.77 596.97,391.79 cw(c603.9,384.86) 603.9,394.66 1176.95,394.66 cw(c1176.95,384.86) 1183.88,391.79 P4.2@1258.54,317.13 1258.68,317.13 1297.51,278.3 ccw(c1304.44,285.23) 1304.44,275.43 1477.34,275.43 ccw(c1477.34,285.23) 1484.27,278.3 1522.67,316.7 P5.2@1522.67,317.13
PIN3: P3.6 U1.H3 | length 737.7
  Top Layer w5.6: U1.H3@97.37,198.68 110.24,211.56 cw(c117.17,204.63) 117.17,214.43 170,214.43 ccw(c170,224.23) 176.93,217.3 255.92,296.3 ccw(c248.99,303.23) 258.79,303.23 258.79,312.51 cw(c268.59,312.51) 261.66,319.44 279.81,337.58 cw(c286.74,330.65) 286.74,340.45 358.38,340.45 ccw(c358.38,350.25) 365.31,343.32 398.42,376.43 cw(c405.35,369.5) 405.35,379.3 437.34,379.3 cw(c437.34,369.5) 444.27,376.43 456.46,364.24 ccw(c463.39,371.17) 463.39,361.37 551.06,361.37 ccw(c551.06,371.17) 557.99,364.24 596.08,402.34 cw(c603.01,395.41) 603.01,405.21 667.81,405.21 cw(c667.81,395.41) 674.74,402.34 695.95,381.13 cw(c689.02,374.2) 698.82,374.2 P3.6@698.82,358.27
PIN4: R7.1 R32.1 U1.F4 | length 342.1
  Top Layer w5.6: U1.F4@65.87,135.69 v2(81.1,120.46)
  Bottom Layer w5.6: v2(81.1,120.46) 81.1,95.24 ccw(c90.9,95.24) 83.97,88.31 96.5,75.78 ccw(c103.43,82.71) 103.43,72.91 153.46,72.91 ccw(c153.46,82.71) 160.39,75.78 179.98,95.37 ccw(c173.05,102.3) 182.85,102.3 182.85,106.75 cw(c192.65,106.75) 185.72,113.68 198.53,126.49 cw(c205.46,119.56) 205.46,129.36 230.81,129.36 ccw(c230.81,139.16) 237.74,132.23 257.52,152 R7.1@258.32,152 300.63,194.31 300.63,201.89 R32.1@299.27,203.25
PIN5: R8.1 R31.1 U1.G2 | length 302
  Top Layer w5.6: U1.G2@128.86,167.19 142.03,180.35 cw(c148.96,173.42) 148.96,183.22 198.88,183.22 ccw(c198.88,193.02) 205.81,186.09 216.02,196.3 ccw(c209.09,203.23) 218.89,203.23 218.89,234.12 cw(c228.69,234.12) 221.76,241.05 294.17,313.46 297.1,313.46 R8.1@297.57,313.94 R31.1@297.32,262.58
PIN6: R10.1 R29.1 U1.G3 | length 291.1
  Top Layer w5.6: U1.G3@97.37,167.19 v2(115.26,181.77)
  Bottom Layer w5.6: v2(115.26,181.77) 140.32,206.83 ccw(c133.39,213.76) 143.19,213.76 143.19,256.65 cw(c152.99,256.65) 146.06,263.58 159.45,276.96 cw(c166.38,270.03) 166.38,279.83 234.41,279.83 ccw(c234.41,289.63) 241.34,282.7 258.32,299.68 R29.1@258.32,299.33 R10.1@258.32,251.8
PIN7: R11.1 R28.1 U1.F3 | length 265.8
  Top Layer w5.6: U1.F3@97.37,135.69 110.23,148.55 cw(c117.16,141.62) 117.16,151.42 202.57,151.42 cw(c202.57,141.62) 209.5,148.55 213.7,144.35 ccw(c220.63,151.28) 220.63,141.48 270.21,141.48 ccw(c270.21,151.28) 277.14,144.35 R28.1@297.06,160.43 R11.1@297.06,210.71
PMODE0: R9.2 U1.G4 | length 59.4
  Top Layer w5.6: U1.G4@65.87,167.19 v2(82.72,181.9)
  Bottom Layer w5.6: v2(82.72,181.9) 83.49,160.66 83.49,152 R9.2@90.58,152
PMODE1: Q4.2 U1.H4 | length 1462.5
  Top Layer w5.6: U1.H4@65.87,198.68 v2(80.55,214.37)
  Mid-Layer 3 w5.6: v2(-1102.1,237.73) -1102.1,274.31 cw(c-1092.3,274.31) -1099.23,281.24 -1002.73,377.73 cw(c-995.8,370.8) -995.8,380.6 16.94,380.6 cw(c16.94,370.8) 23.87,377.73 64.41,337.19 cw(c57.48,330.26) 67.28,330.26 67.28,298.32 cw(c57.48,298.32) 64.41,291.39 62.03,289.01 ccw(c68.96,282.08) 59.16,282.08 59.16,239.82 ccw(c68.96,239.82) 62.03,232.89 v2(80.55,214.37)
  Bottom Layer w5.6: Q4.2@-1142.31,237.85 v2(-1102.1,237.73)
PMODE2: Q2.3 R61.2 U1.L4 | length 1152.8
  Top Layer w5.6: v2(-849.64,330.2) -849.23,330.2 -803.76,284.73 ccw(c-796.83,291.66) -796.83,281.86 -555.34,281.86 ccw(c-555.34,291.66) -548.41,284.73 -532.62,300.52 ccw(c-539.55,307.45) -529.75,307.45 -529.75,346.62 cw(c-519.95,346.62) -526.88,353.55 -512.75,367.67 cw(c-505.82,360.74) -505.82,370.54 -313.74,370.54 cw(c-313.74,360.74) -306.81,367.67 -293.34,354.2 ccw(c-286.41,361.13) -286.41,351.33 -174.82,351.33 ccw(c-174.82,361.13) -167.9,354.2 -149.98,372.12 cw(c-143.05,365.19) -143.05,374.99 -11.35,374.99 cw(c-11.35,365.19) -4.42,372.12 19.95,347.75 ccw(c26.88,354.68) 26.88,344.88 44.89,344.88 cw(c44.89,335.08) 51.82,342.01 67.97,325.87 cw(c61.04,318.94) 70.84,318.94 70.84,302.2 cw(c61.04,302.2) 67.97,295.27 U1.L4@65.87,293.17
  Bottom Layer w5.6: Q2.3@-920.66,308.54 -870.41,308.54 -869.34,309.62 R61.2@-869.34,316.43 v2(-849.64,330.2)